# EAGLE board ME433schematic (EAGLE 9.6.2)
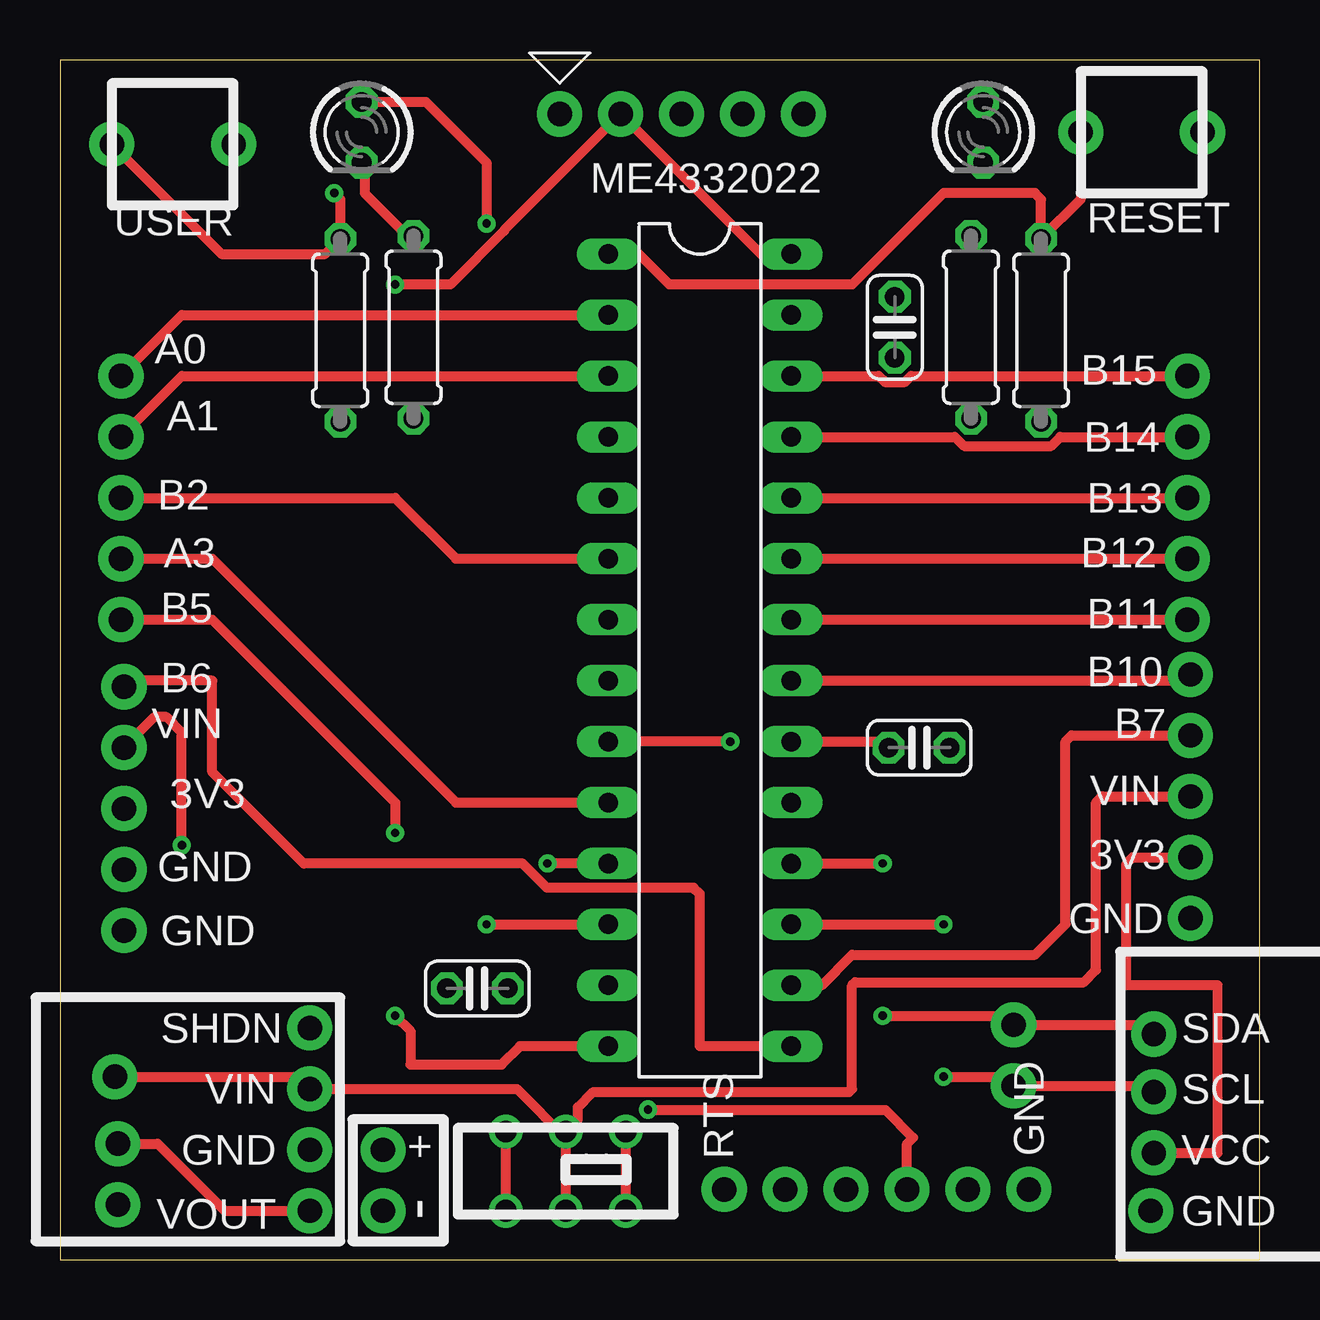
[diagram p0: board, top side]
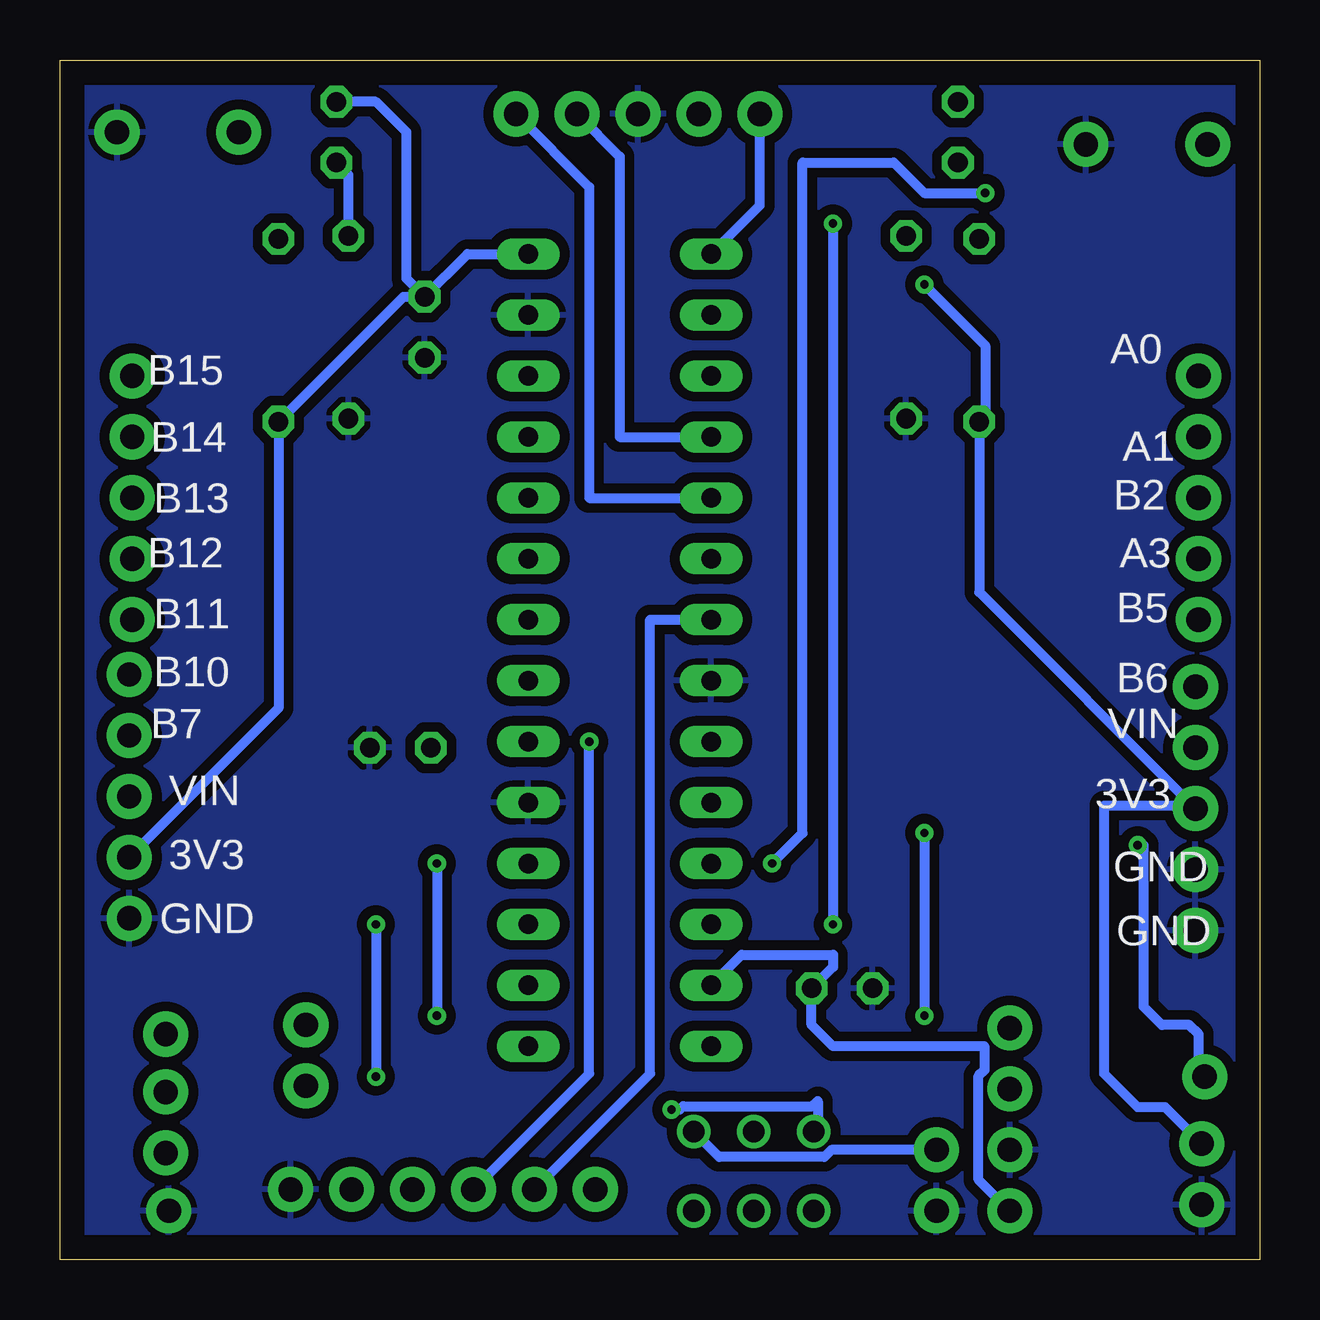
[diagram p1: board, bottom side, seen from below]

Size 50 x 50 mm. Coordinates in mm from the lower left corner, seen from the top.
Outline: 0,0 50,0 50,50 0,50 0,0
Copper layers (1*16): Top 0.035mm / dielectric 1.5mm / Bottom 0.035mm
Design rules "default": minimum track width 6mil, minimum drill 0.35mm, track to track 6mil, track to pad 6mil, pad to pad 6mil, via to via 6mil, smd to smd 6mil, copper to edge 40mil, drill to drill 6mil, minimum pad ring 10mil, minimum via ring 8mil, stop-mask expansion 4mil, vias tented up to drill 0mil, thermal gap 10mil

## Footprints (pad centres in the part's own frame; a part is rotated, then mirrored left to right if it is on the bottom)
C025-024X044 = drill 0.813 octagon: 1 -1.27,0; 2 1.27,0
LED3MM = drill 0.813 octagon: A -1.27,0; K 1.27,0
0207/7 = drill 0.813 octagon: 1 -3.81,0; 2 3.81,0
DIL28-3 = drill 0.813 long: 1 -16.51,-3.81; 2 -13.97,-3.81; 3 -11.43,-3.81; 4 -8.89,-3.81; 5 -6.35,-3.81; 6 -3.81,-3.81; 7 -1.27,-3.81; 8 1.27,-3.81; 9 3.81,-3.81; 10 6.35,-3.81; 11 8.89,-3.81; 12 11.43,-3.81; 13 13.97,-3.81; 14 16.51,-3.81; 15 16.51,3.81; 16 13.97,3.81; 17 11.43,3.81; 18 8.89,3.81; 19 6.35,3.81; 20 3.81,3.81; 21 1.27,3.81; 22 -1.27,3.81; 23 -3.81,3.81; 24 -6.35,3.81; 25 -8.89,3.81; 26 -11.43,3.81; 27 -13.97,3.81; 28 -16.51,3.81
BAT = drill 1.016 pad 1.88: 1 -1.27,0; 2 1.27,0
SLIDE = drill 0.9: 1 -2.5,-1.65; 2 0,-1.65; 3 2.5,-1.65; 4 2.5,1.65; 5 0,1.65; 6 -2.5,1.65
VREG = drill 1.016 pad 1.88: 1 -3.81,0; 2 -1.27,0; 3 1.27,0; 4 3.81,0
USBTOUART = drill 1.016 pad 1.88: 1 -6.35,0; 2 -3.81,0; 3 -1.27,0; 4 1.27,0; 5 3.81,0; 6 6.35,0
SNAP = drill 1.016 pad 1.88: 1 -5.08,0; 2 -2.54,0; 3 0,0; 4 2.54,0; 5 5.08,0
DISPLAY = drill 1.016 pad 1.88: 1. 0,-4.445; 2. 0.127,-2.032; 3. 0.127,0.508; 4. 0.127,2.921
BUTTON = drill 1.016 pad 1.88: 1 -2.54,0; 2 2.54,0
ONE = drill 1.016 pad 1.88: P$1 0,0
FIVE = drill 1.016 pad 1.88: 1 -5.08,0; 2 -2.54,0; 3 0,0; 4 2.54,0; 5 5.08,0

## Placement (x,y rotation side)
C1  0.1 uF  [C025-024X044]  34.8,38.86 270 top
C2  0.1 uF  [C025-024X044]  17.4,11.3 180 top
C3  10 uF  [C025-024X044]  35.81,21.34 0 top
LED1  RED  [LED3MM]  38.48,46.99 270 top
LED2  GREEN  [LED3MM]  12.57,46.99 270 top
R1  330  [0207/7]  37.97,38.86 90 top
R2  330  [0207/7]  14.73,38.86 90 top
R3  10K  [0207/7]  40.89,38.73 270 top
R4  10K  [0207/7]  11.68,38.73 270 top
U$1  PIC32  [DIL28-3]  26.67,25.4 270 top
U$2  BAT  [BAT]  13.46,3.3 90 top
U$3  SLIDE  [SLIDE]  21.08,3.68 180 top
U$4  VREG  [VREG]  10.41,5.84 90 top
U$5  USBTOUART  [USBTOUART]  34.04,2.92 180 top
U$6  SNAP  [SNAP]  25.91,47.75 0 top
U$7  DISPLAY  [DISPLAY]  45.47,6.48 0 top
U$8  RESET  [BUTTON]  45.09,46.99 0 top
U$9  USER  [BUTTON]  4.7,46.48 0 top
U$10  ONE  [ONE]  39.75,9.78 0 top
U$11  ONE  [ONE]  39.75,7.24 0 top
U$12  FIVE  [FIVE]  46.99,31.75 270 top
U$13  FIVE  [FIVE]  47.12,19.3 270 top
U$14  FIVE  [FIVE]  2.67,18.8 270 top
U$15  FIVE  [FIVE]  2.54,31.75 270 top
U$16  ONE  [ONE]  2.29,7.62 0 top
U$17  ONE  [ONE]  2.41,4.83 0 top
U$18  ONE  [ONE]  2.41,2.29 0 top

## Library data of the parts
C1-C3 = ME433PIC32; SPICEPREFIX: C
LED1 LED2 U$1-U$18 = ME433PIC32
R1-R4 = ME433PIC32; SPICEPREFIX: R

## Nets
+3V3: C1.1 C2.1 LED1.A R3.2 R4.2 U$1.13 U$1.28 U$4.1 U$6.2 U$7.2. U$13.4 U$14.3 U$17.P$1
+5V: U$3.3 U$3.4 U$5.3
A0: U$1.2 U$15.1
A1: U$1.3 U$15.2
A3: U$1.10 U$15.4
A4: LED2.A U$1.12
B2: U$1.6 U$15.3
B4: R4.1 U$1.11 U$9.1
B5: U$1.14 U$15.5
B6: U$1.15 U$14.1
B7: U$1.16 U$13.2
B10: U$1.21 U$13.1
B11: U$1.22 U$12.5
B12: U$1.23 U$12.4
B13: U$1.24 U$12.3
B14: U$1.25 U$12.2
B15: U$1.26 U$12.1
GND: C1.2 C2.2 C3.2 R1.1 R2.1 U$1.8 U$1.19 U$1.27 U$2.1 U$4.2 U$5.1 U$6.3 U$7.1. U$8.2 U$9.2 U$13.5 U$14.4 U$14.5 U$18.P$1
MCLR: R3.1 U$1.1 U$6.1 U$8.1
N$1: U$2.2 U$3.1 U$3.6
N$2: LED1.K R1.2
N$5: C3.1 U$1.20
N$6: LED2.K R2.2
PGC: U$1.5 U$6.5
PGD: U$1.4 U$6.4
SCL: U$1.17 U$7.3. U$11.P$1
SDA: U$1.18 U$7.4. U$10.P$1
U1RX: U$1.9 U$5.4
U1TX: U$1.7 U$5.5
VIN: U$3.2 U$3.5 U$4.3 U$13.3 U$14.2 U$16.P$1

## Tracks (layer width: path | path; a pad name or v marks a point on that pad's centre or on a via)
+3V3  (via drill 0.35)
  Top 0.406: U$7.2. 48.26,4.45 48.26,11.43 44.45,11.43 44.45,16.51 44.7,16.76 U$13.4 | U$1.28 29.21,41.91 U$6.2 18.51,42.9 18.51,42.88 16.28,40.64 v13.97,40.64 | U$17.P$1 4.06,4.83 6.86,2.03 U$4.1
  Bottom 0.406: U$13.4 40.89,22.99 R3.2 35.69,40.13 C1.1 | C1.1 35.56,40.89 35.56,46.99 36.83,48.26 LED1.A | C1.1 33.02,41.91 U$1.28 | v13.97,40.64 11.43,38.1 11.43,35.18 R4.2 11.68,27.81 U$14.3 2.79,18.92 6.48,18.92 6.48,7.75 5.08,6.35 3.94,6.35 U$17.P$1 | U$4.1 11.71,3.33 11.71,7.65 11.46,7.9 11.46,8.86 11.48,8.89 17.78,8.89 18.67,9.78 C2.1 17.78,12.19 17.78,12.7 21.59,12.7 U$1.13
+5V  (via drill 0.35)
  Top 0.406: U$3.3 U$3.4 | U$5.3 35.31,4.83 35.56,5.08 34.42,6.22 24.51,6.22 v24.51,6.25
  Bottom 0.406: v24.51,6.25 24.16,6.25 24.02,6.39 18.63,6.39 18.41,6.6 18.41,5.5 U$3.3
A0
  Top 0.406: U$1.2 5.08,39.37 U$15.1
A1
  Top 0.406: U$15.2 5.08,36.83 U$1.3
A3
  Top 0.406: U$15.4 6.35,29.21 16.51,19.05 U$1.10
A4  (via drill 0.35)
  Top 0.406: LED2.A 15.24,48.26 17.78,45.72 v17.78,43.18 | v17.78,13.97 U$1.12
  Bottom 0.406: v17.78,43.18 v17.78,13.97
B2
  Top 0.406: U$15.3 13.97,31.75 16.51,29.21 U$1.6
B4  (via drill 0.35)
  Top 0.406: U$9.1 6.73,41.91 11.05,41.91 R4.1 11.68,44.2 v11.43,44.45 | U$1.11 v20.32,16.51
  Bottom 0.406: v20.32,16.51 19.05,17.78 19.05,45.72 15.24,45.72 13.97,44.45 v11.43,44.45
B5  (via drill 0.35)
  Top 0.406: U$15.5 6.35,26.67 13.97,19.05 v13.97,17.78 | U$1.14 19.18,8.89 18.41,8.13 14.61,8.13 14.61,9.53 v13.97,10.16
  Bottom 0.406: v13.97,17.78 v13.97,10.16
B6
  Top 0.406: U$1.15 26.67,8.89 26.67,15.24 26.42,15.49 20.3,15.49 19.28,16.51 10.16,16.51 6.35,20.32 6.35,24.13 2.92,24.13 U$14.1
B7
  Top 0.406: U$1.16 31.75,11.43 33.02,12.7 40.64,12.7 41.91,13.97 41.91,21.59 42.16,21.84 U$13.2
B10
  Top 0.406: U$1.21 46.86,24.13 U$13.1
B11
  Top 0.406: U$1.22 U$12.5
B12
  Top 0.406: U$1.23 U$12.4
B13
  Top 0.406: U$1.24 U$12.3
B14
  Top 0.406: U$1.25 37.3,34.29 37.68,33.91 41.31,33.91 41.7,34.29 U$12.2
B15
  Top 0.406: U$1.26 34.12,36.83 34.38,36.58 35.22,36.58 35.47,36.83 U$12.1
GND
  pour Bottom (isolate 0.406): 0,0 50.8,0 50.8,50.8 0,50.8
MCLR
  Top 0.406: U$8.1 42.55,44.2 R3.1 40.89,44.2 40.64,44.45 36.83,44.45 33.02,40.64 25.4,40.64 24.13,41.91 U$1.1
  Bottom 0.406: U$1.1 20.83,43.94 U$6.1
N$1
  Top 0.406: U$3.1 U$3.6
  Bottom 0.406: U$2.2 17.84,4.57 18.14,4.27 22.52,4.27 U$3.1
N$2
  Bottom 0.406: R1.2 37.97,45.21 LED1.K
N$5
  Top 0.406: U$1.20 34.29,21.59 C3.1
N$6
  Top 0.406: LED2.K 12.7,45.59 12.7,44.45 14.48,42.67 R2.2
PGC
  Bottom 0.406: U$6.5 27.94,44.7 27.94,31.75 U$1.5
PGD
  Bottom 0.406: U$6.4 26.67,45.97 26.67,34.29 U$1.4
SCL  (via drill 0.35)
  Top 0.406: U$1.17 v36.83,13.97 | v36.83,7.62 39.37,7.62 U$11.P$1 45.34,7.24 U$7.3.
  Bottom 0.406: v36.83,13.97 v36.83,7.62
SDA  (via drill 0.35)
  Top 0.406: U$1.18 v34.29,16.51 | v34.29,10.16 39.37,10.16 U$10.P$1 45.21,9.78 U$7.4.
  Bottom 0.406: v34.29,16.51 v34.29,10.16
U1RX  (via drill 0.35)
  Top 0.406: v27.94,21.59 U$1.9
  Bottom 0.406: U$5.4 27.94,7.75 v27.94,21.59
U1TX
  Bottom 0.406: U$5.5 25.4,7.75 25.4,26.67 U$1.7
VIN  (via drill 0.35)
  Top 0.406: U$13.3 43.43,19.3 43.18,19.05 43.18,12.06 42.67,11.56 33.15,11.56 33.02,11.43 33.02,7.11 32.89,6.99 22.23,6.99 21.59,6.35 21.59,5.84 U$3.2 21.08,5.08 | 21.08,5.08 U$3.5 | U$16.P$1 9.91,7.62 U$4.3 19.05,7.11 21.08,5.08 | v5.08,17.27 5.08,21.97 4.45,22.61 3.94,22.61 U$14.2
  Bottom 0.406: U$16.P$1 2.54,7.87 2.54,9.4 2.92,9.78 4.06,9.78 4.83,10.54 4.83,17.27 v5.08,17.27

## Text on the board
tPlace: ME4332022 | A0 | B15 | A1 | B14 | B2 | B13 | A3 | B12 | B5 | B11 | B6 | B10 | VIN | B7 | 3V3 | VIN | GND | 3V3 | GND | GND
bPlace: A0 | B15 | B14 | A1 | B2 | B13 | A3 | B12 | B5 | B11 | B6 | B10 | VIN | B7 | 3V3 | VIN | GND | 3V3 | GND | GND